# Altium PCB front_sensor.PcbDoc
Units mm, origin at the board's own origin, x right, y up, seen from the top; angles counter-clockwise.
Board outline 120 x 35.31 mm, 2 copper layers (Top Layer, Bottom Layer); 35 components, 40 nets, 143 pads, 50 vias.
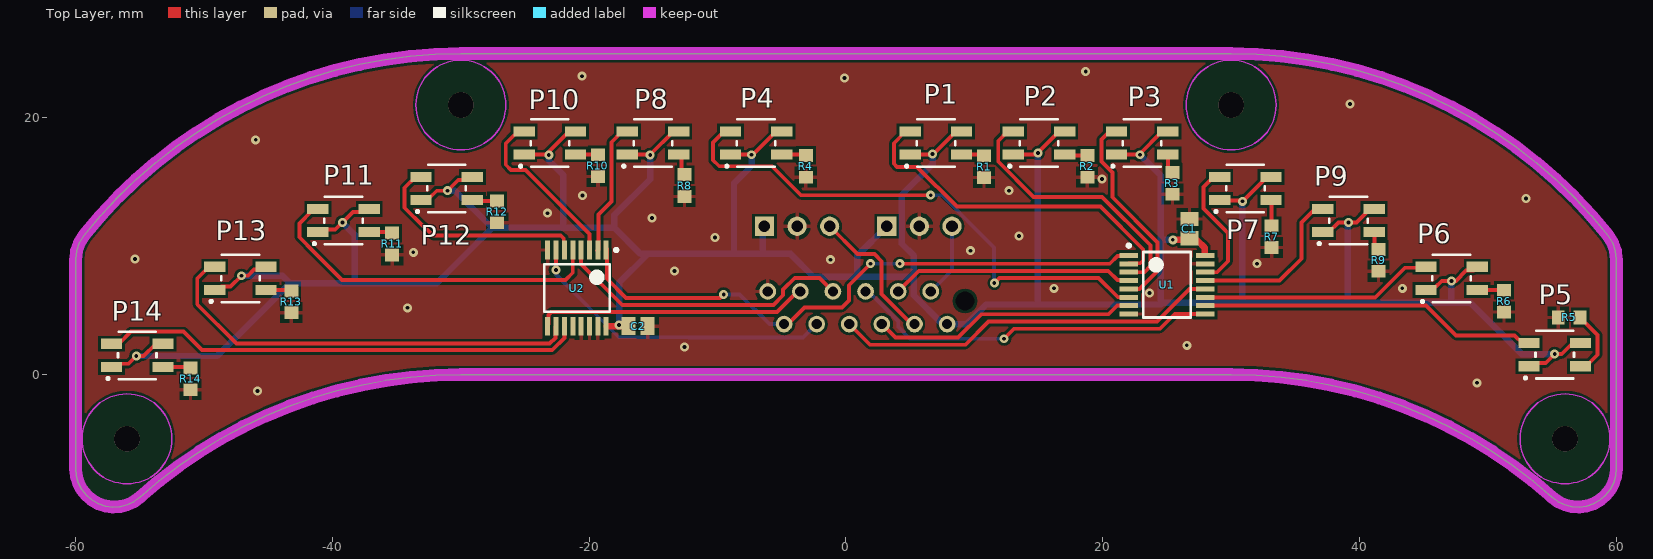
[diagram p0: Top Layer view]
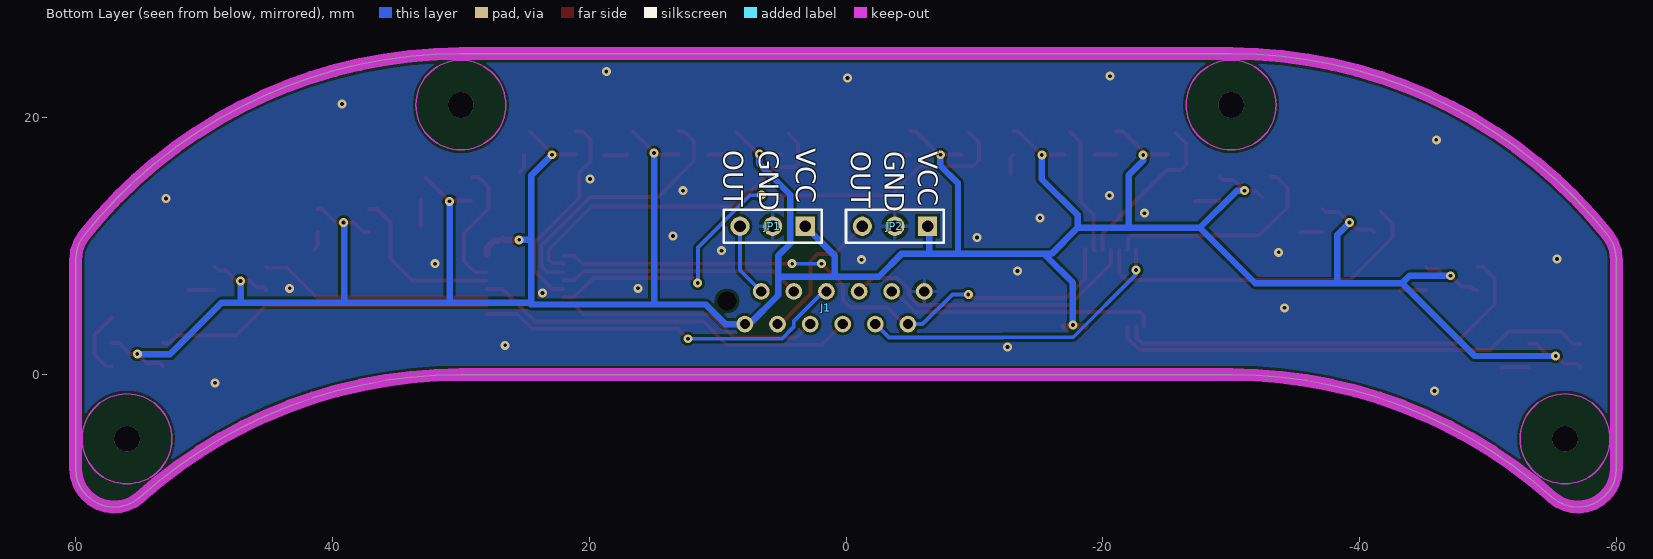
[diagram p1: Bottom Layer view, seen from below]
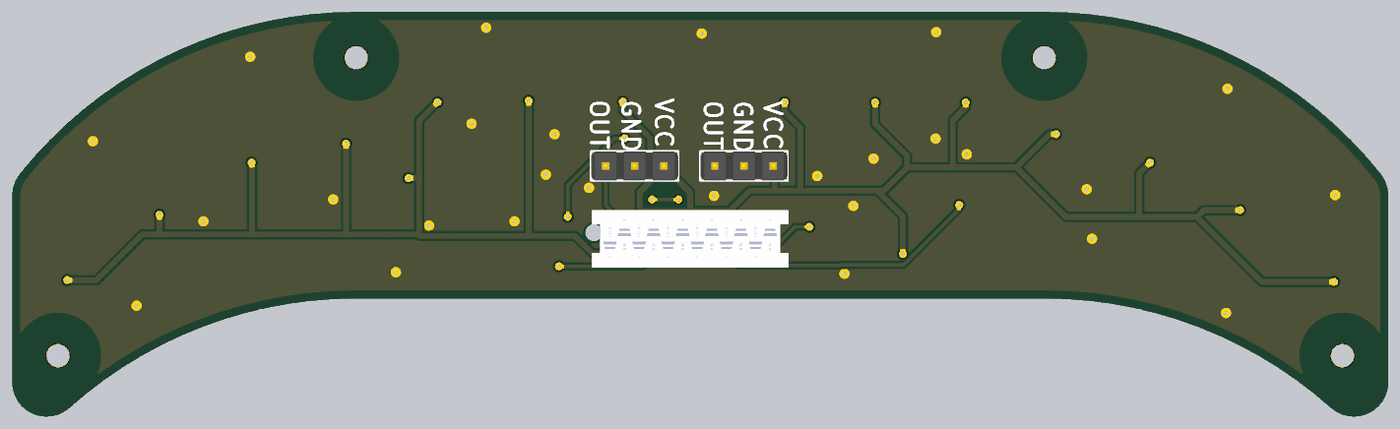
[diagram p2: 3D render of the assembled board from below, using the file's embedded part models]

## Layer stack, top to bottom
Top Solder: solder mask 0.0102, Solder Resist, Dk 3.5
Top Layer: signal copper 0.0356
Dielectric 1: dielectric 0.32, FR-4, Dk 4.8
Bottom Layer: signal copper 0.0356
Bottom Solder: solder mask 0.0102, Solder Resist, Dk 3.5

## Board outline
-30,25 -31.982,24.948 -33.958,24.791 -35.923,24.529 -37.872,24.164 -39.799,23.697 -41.698,23.129 -43.565,22.461 -45.393,21.695 -47.179,20.834 -48.916,19.879 -50.601,18.834 -52.228,17.702 -53.793,16.485 -55.292,15.187 -56.72,13.812 -58.073,12.363 -59.348,10.844 -59.704,10.276 -59.925,9.643 -60,8.977 -60,-7.313 -59.945,-7.885 -59.782,-8.435 -59.517,-8.945 -59.16,-9.395 -58.724,-9.768 -58.225,-10.052 -57.68,-10.235 -57.111,-10.311 -56.538,-10.277 -55.982,-10.135 -55.463,-9.889 -55,-9.549 -53.51,-8.285 -51.956,-7.099 -50.342,-5.997 -48.673,-4.98 -46.953,-4.051 -45.188,-3.213 -43.381,-2.469 -41.538,-1.819 -39.663,-1.266 -37.762,-0.812 -35.84,-0.458 -33.902,-0.204 -31.954,-0.051 -30,0 30,0 31.954,-0.051 33.902,-0.204 35.84,-0.458 37.762,-0.812 39.663,-1.266 41.538,-1.819 43.381,-2.469 45.188,-3.213 46.953,-4.051 48.673,-4.98 50.342,-5.997 51.956,-7.099 53.51,-8.285 55,-9.549 55.463,-9.889 55.982,-10.135 56.538,-10.277 57.111,-10.311 57.68,-10.235 58.225,-10.052 58.724,-9.768 59.16,-9.395 59.517,-8.945 59.782,-8.435 59.945,-7.885 60,-7.313 60,8.977 59.925,9.643 59.704,10.276 59.348,10.844 58.073,12.363 56.72,13.812 55.292,15.187 53.793,16.485 52.228,17.702 50.601,18.834 48.916,19.879 47.179,20.834 45.393,21.695 43.565,22.461 41.698,23.129 39.799,23.697 37.872,24.164 35.923,24.529 33.958,24.791 31.982,24.948 30,25

## Design rules (kind name [scope] priority, off if disabled: settings)
AssemblyTestPointUsage SilkToBoardRegionClearance_1 [All] p2:
AssemblyTestPointUsage SilkToBoardRegionClearance_2 [All] p3:
Clearance [All] p1: gap=0.2
HoleSize [All] p1: absolutevalues=TRUE maxlimit=6.35 minlimit=0.3 maxpercent=80.000 minpercent=20.000
MatchedLengths DiffPair_DIFF100MatchedLengths [InDifferentialPairClass('DIFF100')] p1: tolerance=0.152 checknetsindiffpair=TRUE checkdiffpairvsdiffpair=FALSE checkxsignals=FALSE checkothers=FALSE
MinimumSolderMaskSliver [All] p1: minsoldermaskwidth=0.1
MinimumSolderMaskSliver SilkscreenOverComponentPads_2 [All] p2: minsoldermaskwidth=0.254
MinimumSolderMaskSliver SilkToSolderMaskClearance_1 [IsPad] p3: minsoldermaskwidth=0.254
MinimumSolderMaskSliver SilkscreenOverComponentPads_1 [All] p4: minsoldermaskwidth=0.254
MinimumSolderMaskSliver SilkToSolderMaskClearance [IsPad] p5: minsoldermaskwidth=0.254
MinimumSolderMaskSliver SilkscreenOverComponentPads [All] p6: minsoldermaskwidth=0.254
PolygonConnect via [IsVia] p1: connectstyle=Direct reliefconductorwidth=0.254 reliefentries=4 polygonreliefangle="90 Angle" airgapwidth=0.254
PolygonConnect PolygonConnect_1 [All] p2: connectstyle=Relief reliefconductorwidth=0.3 reliefentries=4 polygonreliefangle="90 Angle" airgapwidth=0.3
RoutingVias [All] p1: holewidth=0.3 width=0.7 viastyle="Through Hole" minholewidth=0.3 minwidth=0.7 maxholewidth=0.5 maxwidth=1
SilkToSilkClearance [All] p1: silktosilkclearance=0.22
SilkToSolderMaskClearance SilkToSolderMaskClearance_2 [IsPad] p1: minsilkscreentomaskgap=0.22 clearancetoexposedcopper=TRUE
SolderMaskExpansion [All] p1: expansion=0.102
Width [All] p1: maxlimit=0.5 minlimit=0.2 preferedwidth=0.3
26 further rules are at their usual default settings.

## Components (designator, comment, footprint, x,y, rotation, side; value= is the part's Value field where it differs from the comment)
C1 "*F *V" C0805 26.75,11.375 r270 top
C2 "*F *V" C0805 -16.2,3.775 r180 top
J1 "HEADER-12" MICRO-MATCH-12 7.874,3.937 r0 bottom
JP1 "PIN_1x3" 2.54_1X3H 3.175,11.557 r0 bottom
JP2 "PIN_1x3" 2.54_1X3H -6.35,11.557 r0 bottom
P1 "QRE1113GR" QRE1113GR 7,18.034 r0 top
P2 "QRE1113GR" QRE1113GR 15.033,18.034 r0 top
P3 "QRE1113GR" QRE1113GR 23.067,18.034 r0 top
P4 "QRE1113GR" QRE1113GR -7,18.034 r0 top
P5 "QRE1113GR" QRE1113GR 55.2,1.55 r0 top
P6 "QRE1113GR" QRE1113GR 47.167,7.5 r0 top
P7 "QRE1113GR" QRE1113GR 31.1,14.5 r0 top
P8 "QRE1113GR" QRE1113GR -15.033,18.034 r0 top
P9 "QRE1113GR" QRE1113GR 39.133,12 r0 top
P10 "QRE1113GR" QRE1113GR -23.067,18.034 r0 top
P11 "QRE1113GR" QRE1113GR -39.133,12 r0 top
P12 "QRE1113GR" QRE1113GR -31.1,14.5 r0 top
P13 "QRE1113GR" QRE1113GR -47.167,7.5 r0 top
P14 "QRE1113GR" QRE1113GR -55.2,1.5 r0 top
R1 "180R" R0603 10.75,16.2 r270 top
R2 "180R" R0603 18.8,16.225 r270 top
R3 "180R" R0603 25.425,14.9 r270 top
R4 "180R" R0603 -3.125,16.225 r270 top
R5 "180R" R0603 56.325,4.45 r180 top
R6 "180R" R0603 51.25,5.725 r270 top
R7 "180R" R0603 33.15,10.75 r270 top
R8 "180R" R0603 -12.575,14.725 r270 top
R9 "180R" R0603 41.475,8.9 r270 top
R10 "180R" R0603 -19.325,16.275 r270 top
R11 "180R" R0603 -35.35,10.175 r270 top
R12 "180R" R0603 -27.175,12.675 r270 top
R13 "180R" R0603 -43.2,5.675 r270 top
R14 "180R" R0603 -51.05,-0.325 r270 top
U1 "mux" TSOP65P650X110-16N 25,7 r0 top
U2 "mux" TSOP65P650X110-16N -20.955,6.731 r270 top

## Footprints (in the part's own frame and the unit in brackets; to place one, negate y for a bottom-side part, rotate by r counter-clockwise, add the part's x,y. Pads: shape width x height; smd on the part's side, far side on the other; paste and mask are expansions set on the pad)
2.54_1X3H [mm] "2.54mm header, 1x3 pins"
  rect 1.5x1.5 hole 0.9: 1(0,0)
  round 1.5 hole 0.9: 2(2.54,0) 3(5.08,0)
  silkscreen extent -1.27,-1.27 6.35,1.27, body extent -1.27,-1.27 6.35,1.27, height 9.5
C0805 [mm] "Chip Capacitor, Body 2.0x1.3mm, IPC High Density"
  rect 1.1x1.4 smd: 1(-0.75,0) 2(0.75,0)
  body extent -1.1,-0.72 1.1,0.72, height 1.4
MICRO-MATCH-12 [mm]
  round 1.3 hole 0.8: 1(0,0) 2(-1.27,-2.54) 3(-2.54,0) 4(-3.81,-2.54) 5(-5.08,0) 6(-6.35,-2.54) 7(-7.62,0) 8(-8.89,-2.54) 9(-10.16,0) 10(-11.43,-2.54) 11(-12.7,0) 12(-13.97,-2.54)
  round 0 hole 1.5 unplated: drill(1.4,-1.8)
  body extent -15.57,-3.77 1.6,1.23, height 4
QRE1113GR [mm] "Reflective Photo Interrupter"
  rect 1.66x0.79 smd: 1(-2,-0.9) 2(2,-0.9) 3(2,0.9) 4(-2,0.9)
  silkscreen extent -2.37,-1.9 1.5,1.85
R0603 [mm] "0603 resistor"
  rect 1x1.1 smd: 1(-0.85,0) 2(0.85,0)
  body extent -0.8,-0.4 0.8,0.4, height 0.45
TSOP65P650X110-16N [mm] "TSOP, 16-Leads, Body 5,00x4,40mm, Pitch 0,65mm, IPC Medium Density"
  rect 1.45x0.39 smd: 1(-2.975,2.275) 2(-2.975,1.625) 3(-2.975,0.975) 4(-2.975,0.325) 5(-2.975,-0.325) 6(-2.975,-0.975) 7(-2.975,-1.625) 8(-2.975,-2.275) 9(2.975,-2.275) 10(2.975,-1.625) 11(2.975,-0.975) 12(2.975,-0.325) 13(2.975,0.325) 14(2.975,0.975) 15(2.975,1.625) 16(2.975,2.275)
  silkscreen extent -3.1,-2.55 1.85,3.17, body extent -2.25,-2.55 2.25,2.55, height 1.1

## Part data
C1 C2: library part Capacitor, "Ceramic capacitor"
P1 P2 P3 P4 P5 P6 P7 P8 P9 P10 P11 P12 P13 P14: "Reflective Photo Interrupter"
R1 R2 R3 R4 R5 R6 R7 R8 R9 R10 R11 R12 R13 R14: library part Resistor, "Resistor"
U1 U2: library part FSAL200, "Analog mux"

## Free pads (board coordinates)
  round 2 hole 2: 1(-56,-5) 1(-30,21) 1(30,21) 1(56,-5)

## Via types
v1: diameter 0.7, hole 0.3, Top Layer to Bottom Layer, 50 vias

## Nets (pads, with @x,y where several pads share a name; then routed paths per layer and width w, separated by ;. In a path a pad name is that pad's centre, name@x,y a point inside that pad or via, vN(x,y) a via of type N, cw(c..) or ccw(c..) an arc to the next point about the centre after c; other vN are vias at no path point)
GND: C1.1 C2.1 J1.12 JP1.2 JP2.2 R1.2 R2.2 R3.2 R4.2 R5.2 R6.2 R7.2 R8.2 R9.2 R10.2 R11.2 R12.2 R13.2 R14.2 U1.8 U1.15 U2.8 U2.13 U2.14 U2.15
  other v1: -45.847,-1.27 49.149,-0.635 -12.573,2.159 26.543,2.286 -34.163,5.207 23.65,6.35 16.2,6.725 43.325,6.725 -13.35,8.075 32.004,8.636 -1.2,8.95 -55.372,9.017 -33.7,9.525 9.7,9.65 -10.2,10.675 13.462,10.795 -15.113,12.192 -23.241,12.573 52.959,13.716 -20.525,13.95 12.7,14.325 19.939,15.24 -45.974,18.288 39.243,21.082 -0.127,23.114 -20.574,23.241 18.669,23.622
NetJ1_2: J1.2 JP1.3 | length 6.1
  Top Layer w0.3: JP1.3@8.001,11.557 JP1.3 JP1.3@8.166,11.468
  Bottom Layer w0.3: J1.2 8.255,8.128 JP1.3
NetJ1_3: J1.3 JP2.3 | length 11.3
  Top Layer w0.3: JP2.3 0.897,9.39 2.217,9.39 2.775,8.832 2.775,6.275 5.113,3.937 J1.3
NetJ1_4: J1.4 U1.4 | length 18.9
  Top Layer w0.3: J1.4 5.669,8.082 20.427,8.082 21.133,7.376 21.974,7.376 U1.4
NetJ1_5: J1.5 U1.7 | length 20.7
  Top Layer w0.3: J1.5 3.848,2.883 8.725,2.883 10.541,4.699 20.449,4.699 21.125,5.375 U1.7
NetJ1_6: J1.6 U1.9 | length 29
  Top Layer w0.3: v1(12.319,2.794) 13.097,3.572 24.447,3.572 25.6,4.725 U1.9
  Bottom Layer w0.3: J1.6 1.745,6.477 4.075,4.147 4.075,3.705 4.986,2.794 v1(12.319,2.794)
NetJ1_7: J1.7 U1.12 | length 30.2
  Top Layer w0.3: J1.7 1.862,2.329 9.314,2.329 11.111,4.126 24.218,4.126 26.767,6.675 U1.12
NetJ1_8: J1.8 U2.4 | length 23.6
  Top Layer w0.3: U2.4 -20.63,8.628 -17.425,5.423 -5.659,5.423 -4.9,6.182 -4.9,6.624 -3.993,7.531 -2.07,7.531 J1.8
NetJ1_9: J1.9 U2.7 | length 24.7
  Top Layer w0.3: v1(-22.58,8.154) U2.7
  Bottom Layer w0.3: v1(-22.58,8.154) -22.58,7.79 -17.703,2.913 -12.261,2.913 -12.231,2.883 -3.34,2.883 J1.9
NetJ1_10: J1.10 U2.9 | length 21.3
  Top Layer w0.3: U2.9 -23.23,3.889 -23.179,3.94 -23.179,4.648 -22.942,4.885 -18.318,4.885 -18.302,4.869 -5.385,4.869 -3.777,6.477 J1.10
NetJ1_11: J1.11 U1.1 U2.1 | length 47.6
  Top Layer w0.3: U2.1 -18.615,9.771 -18.615,7.465 -17.127,5.977 -9.798,5.977 v1(-9.525,6.25) ; J1.11 -4.513,3.937 -3.225,5.225 -0.325,5.225 0.225,5.775 0.225,6.956 v1(1.905,8.636) ; v1(4.191,8.636) 20.545,8.636 21.139,9.23 21.98,9.23 U1.1
  Bottom Layer w0.3: v1(-9.525,6.25) -8.282,6.25 -5.969,3.937 J1.11 ; v1(1.905,8.636) v1(4.191,8.636)
NetP1_2: P1.2 R1.1 | length 1.9
  Top Layer w0.3: P1.2@9.084,17.05 P1.2 10.666,17.134 R1.1
NetP1_4: P1.4 U1.2 | length 27
  Top Layer w0.3: P1.4@4.5,18.8 3.725,18.025 3.725,16.425 3.975,16.175 5.542,16.175 8.636,13.081 19.812,13.081 23.154,9.739 23.154,8.913 22.917,8.676 22.025,8.676 U1.2
NetP2_2: P2.2 R2.1 | length 1.8
  Top Layer w0.3: P2.2 17.092,17.075 R2.1
NetP2_4: P2.4 U1.3 | length 21.2
  Top Layer w0.3: P2.4 12.584,18.934 11.853,18.203 11.853,16.594 14.604,13.843 19.939,13.843 23.708,10.074 23.708,8.447 23.237,7.975 U1.3
NetP3_2: P3.2 R3.1 | length 1.5
  Top Layer w0.3: P3.2 25.067,16.108 R3.1
NetP3_4: P3.4 U1.5 | length 16.3
  Top Layer w0.3: P3.4 20.507,18.934 19.887,18.313 19.887,16.594 20.75,15.731 20.75,13.815 24.262,10.303 24.262,8.071 22.866,6.675 U1.5
NetP4_2: P4.2 R4.1 | length 1.9
  Top Layer w0.3: P4.2 -3.184,17.134 R4.1
NetP4_4: P4.4 U1.6 | length 41.2
  Top Layer w0.3: P4.4@-9.575,18.85 -10.35,18.075 -10.35,16.7 -9.875,16.225 -5.75,16.225 -3.5,13.975 v1(6.6,13.975) ; v1(11.55,7.125) 11.953,7.528 19.672,7.528 21.175,6.025 U1.6
  Bottom Layer w0.3: v1(6.6,13.975) 7.469,13.975 11.535,9.91 11.535,7.14 v1(11.55,7.125)
NetP5_2: P5.2 R5.1 | length 5.2
  Top Layer w0.3: R5.1 58.525,3.1 58.525,1.55 57.625,0.65 P5.2
NetP5_4: P5.4 U1.10 | length 26.4
  Top Layer w0.3: U1.10 45.171,5.375 47.498,3.048 52.077,3.048 52.675,2.45 P5.4
NetP6_2: P6.2 R6.1 | length 2.1
  Top Layer w0.3: P6.2 51.225,6.6 R6.1
NetP6_4: P6.4 U1.11 | length 18.2
  Top Layer w0.3: U1.11 28,6 41.225,6 43.55,8.325 45.092,8.325 P6.4
NetP7_2: P7.2 R7.1 | length 2
  Top Layer w0.3: P7.2 33.15,13.55 R7.1
NetP7_4: P7.4 U1.14 | length 10.3
  Top Layer w0.3: U1.14 28.9,7.975 29.75,8.825 29.75,11.025 27.85,12.925 27.85,14.625 28.625,15.4 P7.4
NetP8_2: P8.2 R8.1 | length 1.6
  Top Layer w0.3: P8.2 -12.8,16.901 R8.1@-12.8,15.625
NetP8_4: P8.4 U2.2 | length 10
  Top Layer w0.3: U2.2@-19.381,9.652 -19.279,9.754 -19.279,12.471 -18.275,13.475 -18.275,18.1 P8.4@-17.475,18.9
NetP9_2: P9.2 R9.1 | length 1.5
  Top Layer w0.3: P9.2 41.15,11.083 41.15,10 R9.1@41.425,9.725
NetP9_4: P9.4 U1.13 | length 13.1
  Top Layer w0.3: U1.13 33.775,7.325 35.472,9.022 35.472,11.847 36.525,12.9 P9.4
NetP10_2: P10.2 R10.1 | length 1.8
  Top Layer w0.3: P10.2@-21.058,17.125 P10.2 -19.334,17.134 R10.1
NetP10_4: P10.4 U2.3 | length 12.8
  Top Layer w0.3: P10.4@-25.7,18.8 -26.5,18 -26.5,16.35 -26.1,15.95 -24.967,15.95 -19.98,10.963 U2.3
NetP11_2: P11.2 R11.1 | length 1.8
  Top Layer w0.3: P11.2 -35.425,11.1 R11.1
NetP11_4: P11.4 U2.5 | length 27.1
  Top Layer w0.3: P11.4@-41.625,12.725 -42.575,11.775 -42.575,10.7 -41.4,9.525 -41.4,9.523 -39.243,7.366 -21.844,7.366 -21.28,7.93 U2.5
NetP12_2: P12.2 R12.1 | length 2
  Top Layer w0.3: P12.2 -29.025,13.525 R12.1
NetP12_4: P12.4 U2.6 | length 17.5
  Top Layer w0.3: P12.4 -33.525,15.4 -34.375,14.55 -34.375,13 -32.939,11.564 -32.9,11.564 -32.171,10.835 -22.218,10.835 -21.981,10.598 -21.981,9.757 U2.6
NetP13_2: P13.2 R13.1 | length 2
  Top Layer w0.3: P13.2 -43.275,6.6 R13.1
NetP13_4: P13.4 U2.10 | length 34
  Top Layer w0.3: P13.4 -49.6,8.4 -50.525,7.475 -50.525,5.475 -47.463,2.413 -23.082,2.413 -22.631,2.864 -22.631,3.705 U2.10
NetP14_2: P14.2 R14.1 | length 2.2
  Top Layer w0.3: P14.2 -51.125,0.6 R14.1
NetP14_4: P14.4 U2.11 | length 37.5
  Top Layer w0.3: P14.4 -56.625,2.4 -55.675,3.35 -51.6,3.35 -50.163,1.913 -22.875,1.913 -21.93,2.858 U2.11
VCC: C1.2 C2.2 J1.1 JP1.1 JP2.1 P1.1 P1.3 P2.1 P2.3 P3.1 P3.3 P4.1 P4.3 P5.1 P5.3 P6.1 P6.3 P7.1 P7.3 P8.1 P8.3 P9.1 P9.3 P10.1 P10.3 P11.1 P11.3 P12.1 P12.3 P13.1 P13.3 P14.1 P14.3 U1.16 U2.16 | length 289
  Top Layer w0.3: P14.1 -56.95,0.85 -55.875,0.85 v1(-55.275,1.45) -54.7,1.45 -53.75,2.4 P14.3 ; P13.1 -48.9,6.6 -48.65,6.85 -47.925,6.85 v1(-47.075,7.7) -46.575,7.7 -46.1,8.175 -45.392,8.175 P13.3 ; P11.1 -40.933,11.3 -39.775,11.3 v1(-39.225,11.85) -38.4,12.675 -37.358,12.675 P11.3 ; P12.1@-32.425,13.775 -31.875,14.325 v1(-31.025,14.325) -30.2,15.15 -29.35,15.15 P12.3 ; P10.1 v1@-23.375,17.134 ; v1@-23.366,17.134 -21.566,18.934 P10.3 ; P8.1 v1@-15.275,17.134 ; v1@-15.241,17.134 -13.441,18.934 P8.3 ; P4.1 v1@-7.35,17.134 ; v1@-7.241,17.134 -5.441,18.934 P4.3 ; P1.1 v1@6.75,17.134 ; v1@6.775,17.15 P1.3@8.559,18.934 ; P2.1 v1@14.792,17.134 ; v1@14.929,17.271 P2.3@16.592,18.934 ; P3.1 v1@22.826,17.134 ; v1@22.858,17.167 P3.3@24.626,18.934 ; P7.1@29.2,13.55 v1@30.875,13.55 ; v1@30.959,13.55 P7.3@32.759,15.35 ; P9.1 37.6,11.1 38.35,11.85 v1(39.125,11.85) 39.75,11.85 40.8,12.9 P9.3 ; P6.1 45.342,6.775 45.875,6.775 46.4,7.3 v1(47.15,7.3) 47.5,7.3 48.3,8.1 48.867,8.1 P6.3 ; P5.1 53.45,0.9 54.5,0.9 v1(55.2,1.6) 55.75,1.6 56.6,2.45 P5.3
  Top Layer w0.5: U2.16@-18.631,3.756 -17.674,3.767 C2.2 ; v1(25.45,10.5) 26.625,10.5 C1.2 ; C1.2@27.075,10.425 27.4,10.425 27.928,9.897 27.928,9.371 U1.16@27.975,9.324
  Bottom Layer w0.5: v1(-55.275,1.45) -48.969,1.45 -43.307,7.112 ; v1(-47.075,7.7) -43.895,7.7 -43.307,7.112 ; v1(-39.225,11.85) -38.275,10.9 -38.275,7.112 ; v1(-31.025,14.325) -30.454,14.325 -27.559,11.43 ; v1(-23.15,17.1) -23.15,16.675 -22.025,15.55 -22.025,11.43 ; v1(-17.675,3.875) -17.675,7.15 -15.525,9.3 ; v1(-15.25,17.1) -15.25,15.225 -18.034,12.441 -18.034,11.43 ; v1(-7.35,17.125) -7.35,16.275 -8.725,14.9 -8.725,9.398 ; JP2.1@-6.477,11.557 -6.477,9.398 ; 0.889,7.758 0.889,9.271 JP1.1 ; v1(6.75,17.175) 6.75,16.4 4.35,14 4.35,10.2 5.275,9.275 5.275,7.631 ; v1(14.95,17.25) 14.95,5.461 ; v1(22.9,17.125) 24.511,15.514 24.511,10.45 ; 24.511,5.461 14.95,5.461 ; v1(25.45,10.5) 24.561,10.5 24.511,10.45 ; v1(30.875,13.5) 30.875,5.588 ; v1(39.125,11.85) 39.075,11.8 39.075,5.588 ; v1(47.15,7.3) 47.15,5.588 ; v1(55.2,1.6) 52.629,1.6 48.641,5.588 47.15,5.588 ; -43.307,7.112 -38.275,7.112 ; -38.275,7.112 -31.877,7.112 -27.559,11.43 ; -27.559,11.43 -22.025,11.43 ; -22.025,11.43 -18.034,11.43 ; -18.034,11.43 -16.002,9.398 -8.725,9.398 ; -8.725,9.398 -6.477,9.398 ; -6.477,9.398 -4.318,9.398 -2.551,7.631 5.275,7.631 ; 5.275,7.631 5.275,6.174 7.512,3.937 J1.1 9.398,3.937 10.922,5.461 14.95,5.461 ; 24.511,10.45 24.511,5.588 30.875,5.588 ; 30.875,5.588 39.075,5.588 ; 39.075,5.588 47.15,5.588
pads on no net: J1.drill U2.12

## Polygon pours and split planes (outlines as drawn)
GND on Top Layer "Top GND" (solid, remove dead copper, pour order 0): -30,25 -31.982,24.948 -33.958,24.791 -35.923,24.529 -37.872,24.164 -39.799,23.697 -41.698,23.129 -43.565,22.461 -45.393,21.695 -47.179,20.834 -48.916,19.879 -50.601,18.834 -52.228,17.702 -53.793,16.485 -55.292,15.187 -56.72,13.812 -58.073,12.363 -59.348,10.844 -59.704,10.276 -59.925,9.643 -60,8.977 -60,-7.313 -59.945,-7.885 -59.782,-8.435 -59.517,-8.945 -59.16,-9.395 -58.724,-9.768 -58.225,-10.052 -57.68,-10.235 -57.111,-10.311 -56.538,-10.277 -55.982,-10.135 -55.463,-9.889 -55,-9.549 -53.51,-8.285 -51.956,-7.099 -50.342,-5.997 -48.673,-4.98 -46.953,-4.051 -45.188,-3.213 -43.381,-2.469 -41.538,-1.819 -39.663,-1.266 -37.762,-0.812 -35.84,-0.458 -33.902,-0.204 -31.954,-0.051 -30,0 30,0 31.954,-0.051 33.902,-0.204 35.84,-0.458 37.762,-0.812 39.663,-1.266 41.538,-1.819 43.381,-2.469 45.188,-3.213 46.953,-4.051 48.673,-4.98 50.342,-5.997 51.956,-7.099 53.51,-8.285 55,-9.549 55.463,-9.889 55.982,-10.135 56.538,-10.277 57.111,-10.311 57.68,-10.235 58.225,-10.052 58.724,-9.768 59.16,-9.395 59.517,-8.945 59.782,-8.435 59.945,-7.885 60,-7.313 60,8.977 59.925,9.643 59.704,10.276 59.348,10.844 58.073,12.363 56.72,13.812 55.292,15.187 53.793,16.485 52.228,17.702 50.601,18.834 48.916,19.879 47.179,20.834 45.393,21.695 43.565,22.461 41.698,23.129 39.799,23.697 37.872,24.164 35.923,24.529 33.958,24.791 31.982,24.948 30,25
GND on Bottom Layer "Bot GND" (solid, remove dead copper, pour order 1): -30,25 -31.982,24.948 -33.958,24.791 -35.923,24.529 -37.872,24.164 -39.799,23.697 -41.698,23.129 -43.565,22.461 -45.393,21.695 -47.179,20.834 -48.916,19.879 -50.601,18.834 -52.228,17.702 -53.793,16.485 -55.292,15.187 -56.72,13.812 -58.073,12.363 -59.348,10.844 -59.704,10.276 -59.925,9.643 -60,8.977 -60,-7.313 -59.945,-7.885 -59.782,-8.435 -59.517,-8.945 -59.16,-9.395 -58.724,-9.768 -58.225,-10.052 -57.68,-10.235 -57.111,-10.311 -56.538,-10.277 -55.982,-10.135 -55.463,-9.889 -55,-9.549 -53.51,-8.285 -51.956,-7.099 -50.342,-5.997 -48.673,-4.98 -46.953,-4.051 -45.188,-3.213 -43.381,-2.469 -41.538,-1.819 -39.663,-1.266 -37.762,-0.812 -35.84,-0.458 -33.902,-0.204 -31.954,-0.051 -30,0 30,0 31.954,-0.051 33.902,-0.204 35.84,-0.458 37.762,-0.812 39.663,-1.266 41.538,-1.819 43.381,-2.469 45.188,-3.213 46.953,-4.051 48.673,-4.98 50.342,-5.997 51.956,-7.099 53.51,-8.285 55,-9.549 55.463,-9.889 55.982,-10.135 56.538,-10.277 57.111,-10.311 57.68,-10.235 58.225,-10.052 58.724,-9.768 59.16,-9.395 59.517,-8.945 59.782,-8.435 59.945,-7.885 60,-7.313 60,8.977 59.925,9.643 59.704,10.276 59.348,10.844 58.073,12.363 56.72,13.812 55.292,15.187 53.793,16.485 52.228,17.702 50.601,18.834 48.916,19.879 47.179,20.834 45.393,21.695 43.565,22.461 41.698,23.129 39.799,23.697 37.872,24.164 35.923,24.529 33.958,24.791 31.982,24.948 30,25

## Keep-outs
Keep-Out Layer:
  circle w0.1: c-56,-5 r3.5
  circle w0.1: c-30,21 r3.5
  circle w0.1: c30,21 r3.5
  circle w0.1: c56,-5 r3.5
  lines w1: -60,-7.313 -60,8.977 -59.925,9.643 -59.704,10.276 -59.348,10.844 -58.073,12.363 -56.72,13.812 -55.292,15.187 -53.793,16.485 -52.228,17.702 -50.601,18.834 -48.916,19.879 -47.179,20.834 -45.393,21.695 -43.565,22.461 -41.698,23.129 -39.799,23.697 -37.872,24.164 -35.923,24.529 -33.958,24.791 -31.982,24.948 -30,25 30,25 31.982,24.948 33.958,24.791 35.923,24.529 37.872,24.164 39.799,23.697 41.698,23.129 43.565,22.461 45.393,21.695 47.179,20.834 48.916,19.879 50.601,18.834 52.228,17.702 53.793,16.485 55.292,15.187 56.72,13.812 58.073,12.363 59.348,10.844 59.704,10.276 59.925,9.643 60,8.977 60,-7.313 59.945,-7.885 59.782,-8.435 59.517,-8.945 59.16,-9.395 58.724,-9.768 58.225,-10.052 57.681,-10.235 57.111,-10.311 56.538,-10.277 55.982,-10.135 55.463,-9.889 55,-9.549 53.51,-8.285 51.956,-7.099 50.342,-5.997 48.673,-4.98 46.953,-4.051 45.188,-3.213 43.381,-2.469 41.538,-1.819 39.663,-1.266 37.762,-0.812 35.84,-0.458 33.902,-0.204 31.954,-0.051 30,0 -30,0 -31.954,-0.051 -33.902,-0.204 -35.84,-0.458 -37.762,-0.812 -39.663,-1.266 -41.538,-1.819 -43.381,-2.469 -45.188,-3.213 -46.953,-4.051 -48.673,-4.98 -50.342,-5.997 -51.956,-7.099 -53.51,-8.285 -55,-9.549 -55.463,-9.889 -55.982,-10.135 -56.538,-10.277 -57.111,-10.311 -57.681,-10.235 -58.225,-10.052 -58.724,-9.768 -59.16,-9.395 -59.517,-8.945 -59.782,-8.435 -59.945,-7.885 -60,-7.313

## Silkscreen, mask and mechanical layers (free items; w line width, h text height)
Bottom Overlay:
  text "VCC" at 3.875,17.625 h1.5 r90
  text "GND" at 6.775,17.475 h1.5 r90
  text "OUT" at 9.525,17.475 h1.5 r90
  text "VCC" at -5.615,17.406 h1.5 r90
  text "GND" at -3.012,17.406 h1.5 r90
  text "OUT" at -0.408,17.406 h1.5 r90